# Altium PCB usb_to_rs232.PcbDoc
Units mm, origin at the board's own origin, x right, y up, seen from the top; angles counter-clockwise.
Board outline 44.32 x 31.24 mm, 2 copper layers (Top Layer, Bottom Layer); 12 components, 20 nets, 70 pads, 6 vias.
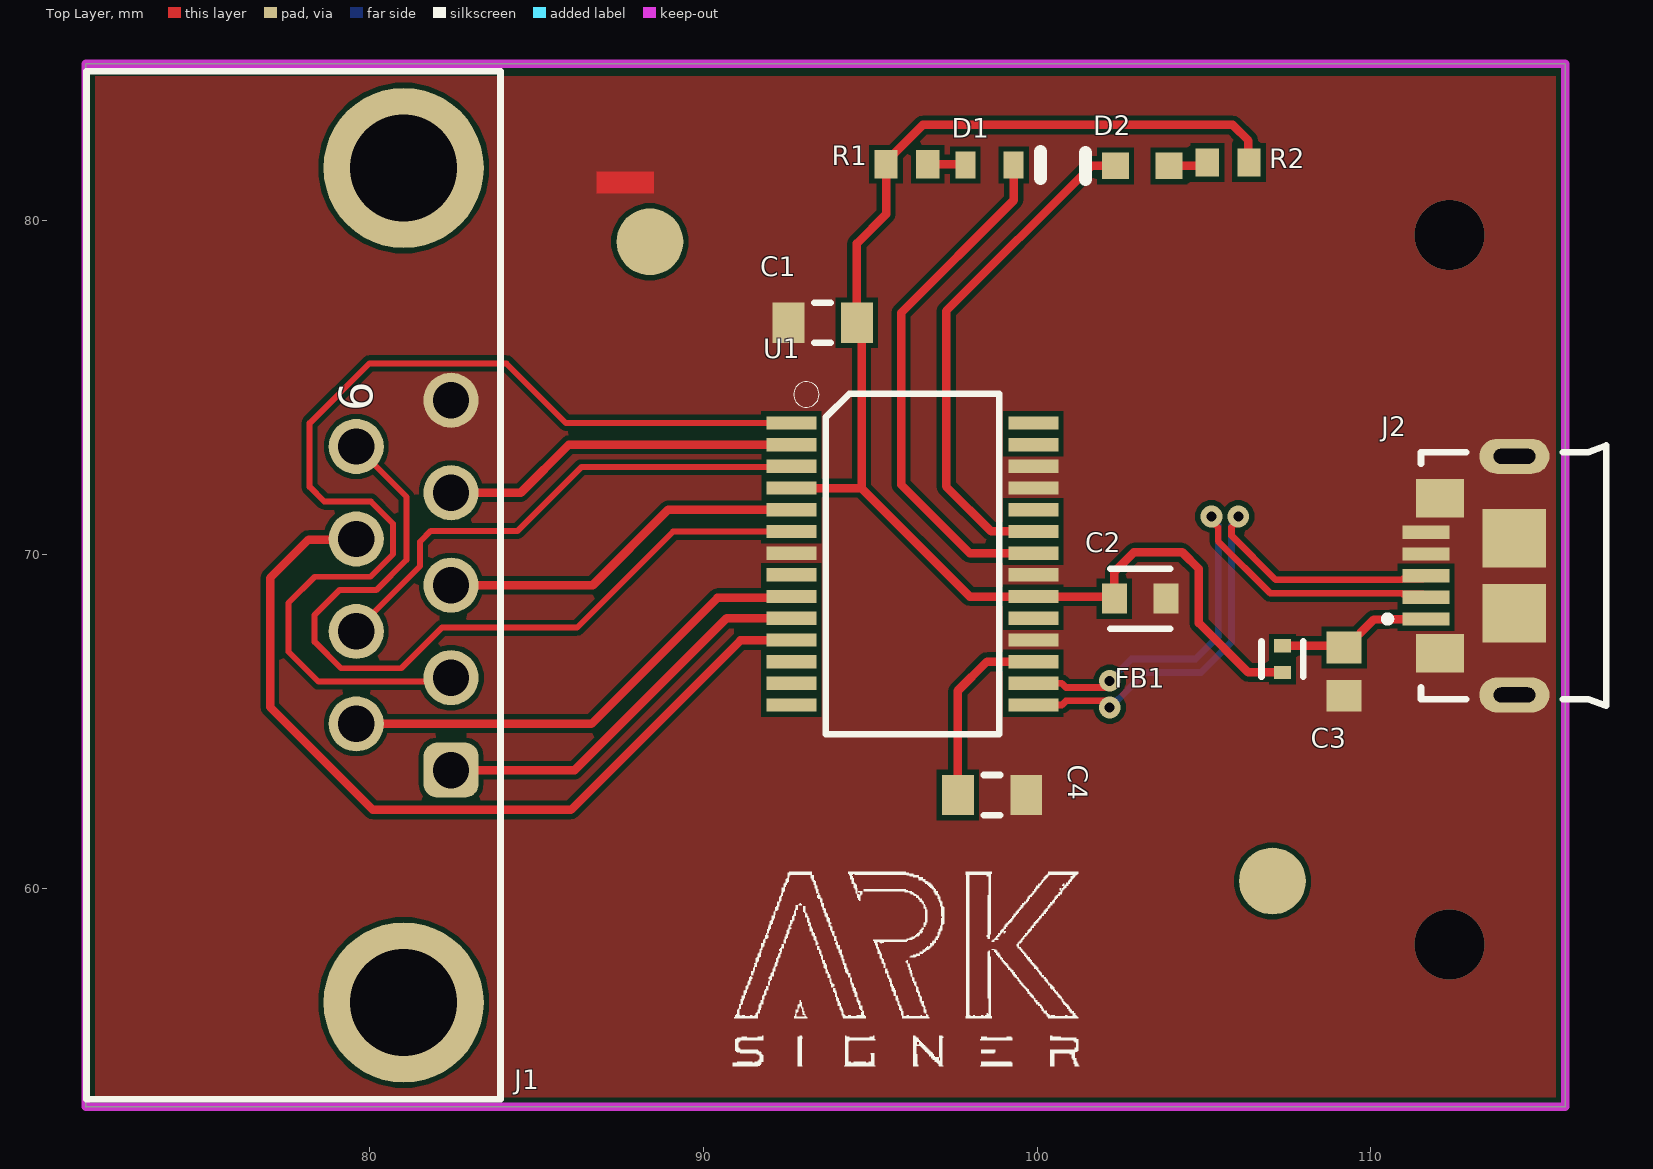
[diagram p0: Top Layer view]
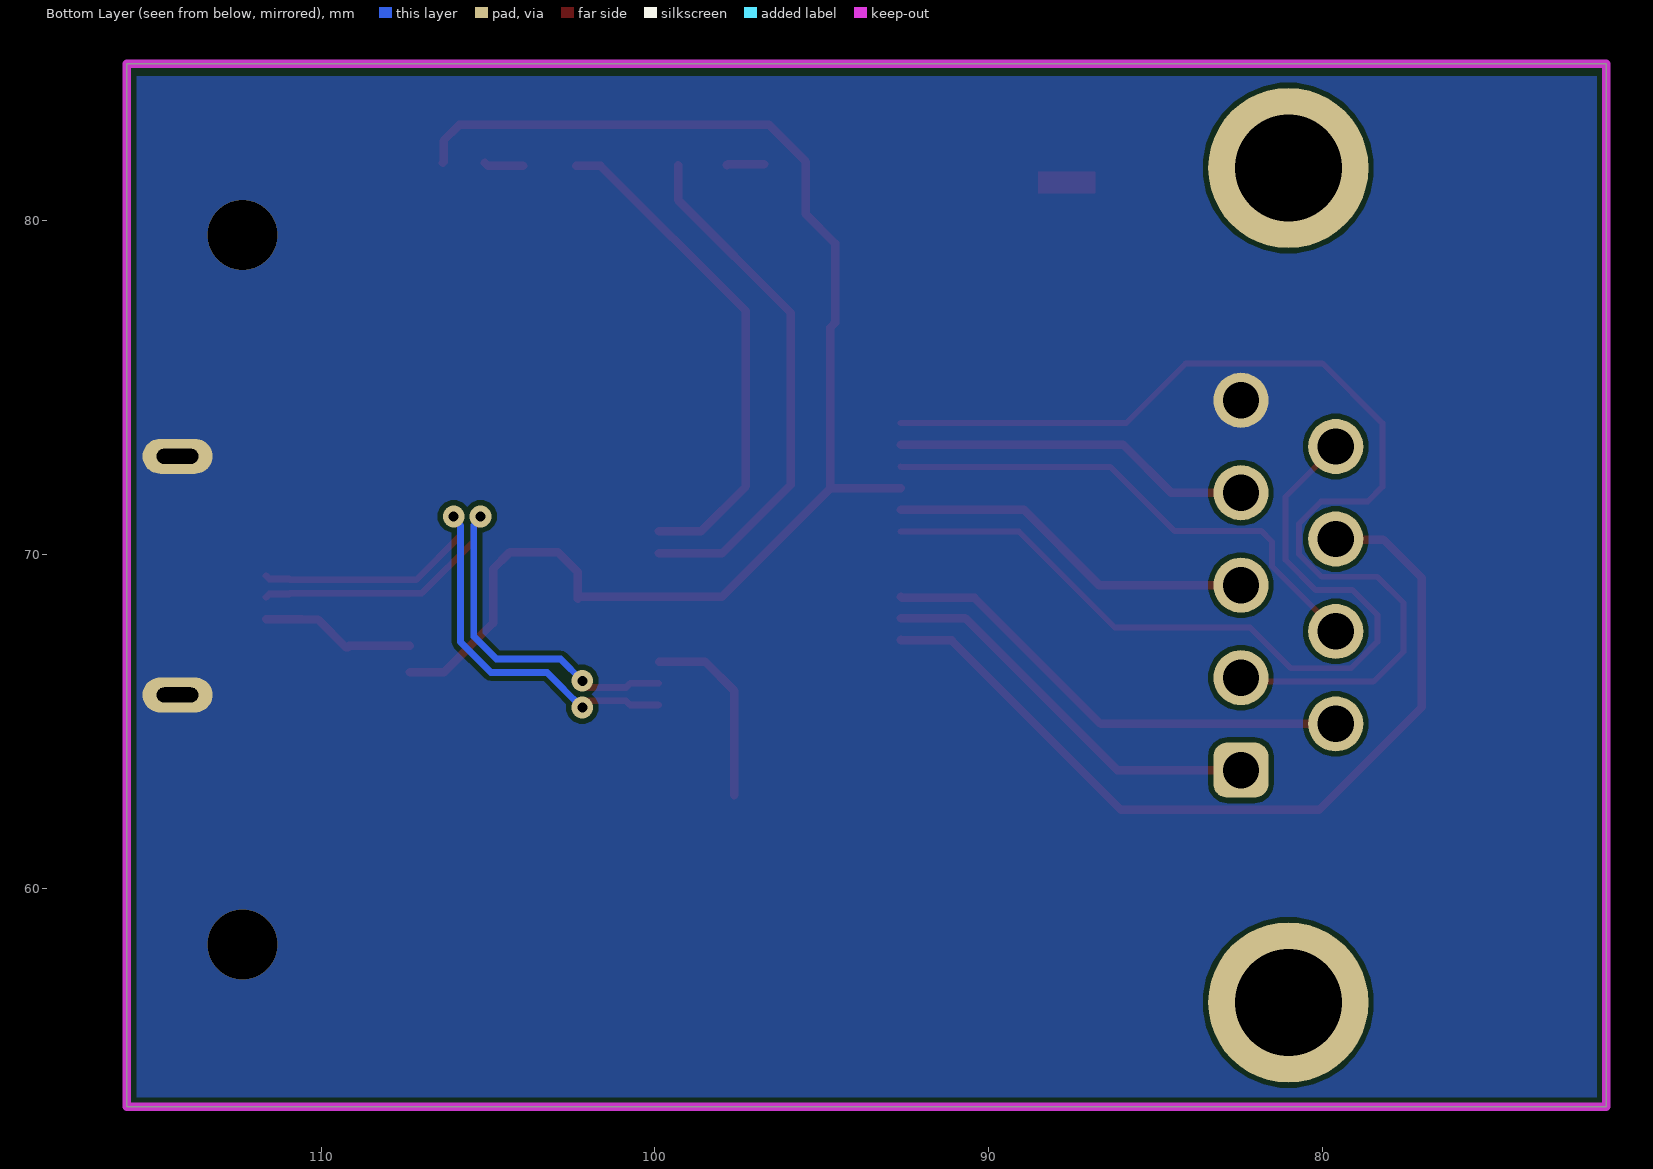
[diagram p1: Bottom Layer view, seen from below]
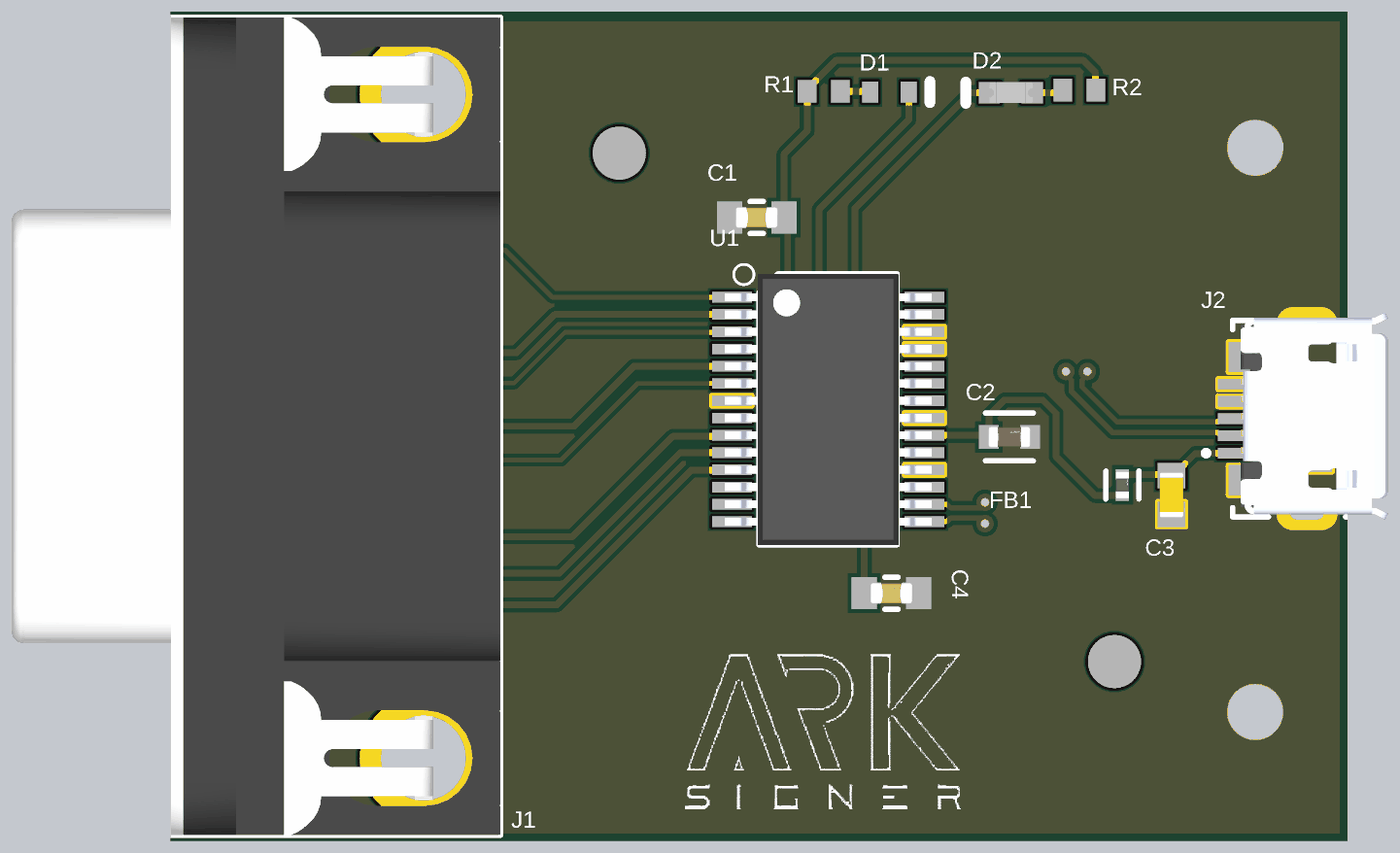
[diagram p2: 3D render of the assembled board from above, using the file's embedded part models]

## Layer stack, top to bottom
Top Solder: solder mask 0.0102, Solder Resist, Dk 3.5
Top Layer: signal copper 0.0356
Dielectric 1: dielectric 0.32, FR-4, Dk 4.8
Bottom Layer: signal copper 0.0356
Bottom Solder: solder mask 0.0102, Solder Resist, Dk 3.5

## Board outline
71.501,53.467 71.501,84.709 115.824,84.709 115.824,53.467

## Design rules (kind name [scope] priority, off if disabled: settings)
Clearance [All] p1: gap=0.15 ignorepadtopadclearanceinfootprint=FALSE
ComponentClearance [All] p1: gap=0 collisioncheckmode=3 verticalgap=0 showdistances=FALSE
DiffPairsRouting [All] p1: maxlimit=0.254 minlimit=0.2 mostfreqgap=0.2 toplayer_minwidth=0.2 toplayer_maxwidth=0.381 toplayer_prefwidth=0.2 bottomlayer_minwidth=0.2 bottomlayer_maxwidth=0.381 bottomlayer_prefwidth=0.2 maxuncoupledlength=12.7
PlaneConnect [All] p1: planeconnectstyle=Direct reliefexpansion=0.508 reliefentries=4 reliefconductorwidth=0.254 reliefairgap=0.254
PolygonConnect [All] p1: connectstyle=Direct reliefconductorwidth=0.254 reliefentries=4 polygonreliefangle="90 Angle" airgapwidth=0.254
RoutingVias [All] p1: holewidth=0.3 width=0.655 viastyle="Through Hole" minholewidth=0.3 minwidth=0.655 maxholewidth=0.711 maxwidth=1.27
SolderMaskExpansion [All] p1: expansion=0.102 istentingtop=FALSE
Width [All] p1: maxlimit=0.254 minlimit=0.15 preferedwidth=0.254 minimp=50.000000 maximp=50.000000 favimp=50.000000
27 further rules are at their usual default settings.

## Classes and differential pairs
differential pair Diff: +Diff_P -Diff_N

## Components (designator, comment, footprint, x,y, rotation, side; value= is the part's Value field where it differs from the comment)
C1 "100nF" FP-CGA3E-0_3-0_1-IPC_A 93.575,76.95 r180 top
C2 "4.7uF" FP-GRM188-0_2-MFG 103.092,68.684 r0 top
C3 "10nF" CAPC1608X90X35ML10T15 109.2,66.5 r90 top
C4 "100nF" FP-CGA3E-0_3-0_1-IPC_A 98.65,62.8 r0 top
D1 "TLMS1000-GS08" VISH-TLMS1000_V 98.575,81.675 r0 top
D2 "598-8070-107F" DIAL-0603-2_V 103.15,81.65 r0 top
FB1 "BLM15AG601SN1D" FP-BLM15-0_05-MFG 107.35,66.875 r90 top
J1 "618009211821" 618009211821 77.724,69.088 r270 top
J2 "USB3075-30-A" GCT_USB3075-30-A 111.65,68.075 r90 top
R1 "270R" RESC1608X55X30LL15T15 96.1,81.7 r180 top
R2 "270R" RESC1608X55X30LL15T15 105.725,81.75 r0 top
U1 "INTERFACE-FT232RL(SSOP28)" SSOP28-0.65-10.2X5.2MM 96.266,69.723 r270 top

## Footprints (in the part's own frame and the unit in brackets; to place one, negate y for a bottom-side part, rotate by r counter-clockwise, add the part's x,y. Pads: shape width x height; smd on the part's side, far side on the other; paste and mask are expansions set on the pad)
618009211821 [mm] "09p 8.08mm bracket, board lock & UNC4-40 Rivet without hex screw"
  rrect50% 1.65x1.65 hole 1.09: 1(5.54,4.72)
  round 1.65 hole 1.09: 2(2.77,4.72) 3(0,4.72) 4(-2.77,4.72) 5(-5.54,4.72) 6(4.155,1.88) 7(1.385,1.88) 8(-1.385,1.88) 9(-4.155,1.88)
  round 4.8 hole 3.2: M1(-12.5,3.3) M2(12.5,3.3)
  silkscreen extent -15.4,-6.2 15.4,6.2, body extent -15.4,-12.2 15.4,6.2, height 12.55
CAPC1608X90X35ML10T15 [mm] "Chip Capacitor, 2-Leads, Body 1.7x0.9mm, IPC Low Density"
  rect 0.95x1.05 smd: 1(-0.725,0) 2(0.725,0)
  body extent -0.85,-0.45 0.85,0.45, height 0.9
DIAL-0603-2_V [mm] "LED, 2-Leads, Body 1.6x0.8mm"
  rect 0.8x0.8 smd: 1(-0.8,0) 2(0.8,0)
  silkscreen extent -1.7,-0.4 -1.7,0.4, body extent -0.81,-0.39 0.81,0.39, height 0.71
FP-BLM15-0_05-MFG [mm]
  rect 0.4x0.5 smd paste+0 mask+0: 1(-0.4,0) 2(0.4,0)
  silkscreen extent -0.53,-0.63 0.52,0.63, body extent -0.7,-0.38 0.7,0.38, height 0.25
FP-CGA3E-0_3-0_1-IPC_A [mm]
  rect 0.956x1.206 smd paste+0 mask+0: 1(-1.025,0) 2(1.025,0)
  silkscreen extent -0.25,-0.6 0.25,0.6, body extent -2,-1.1 2,1.1, height 0.25
FP-GRM188-0_2-MFG [mm]
  rect 0.75x0.9 smd paste+0 mask+0: 1(-0.775,0) 2(0.775,0)
  silkscreen extent -0.9,-0.9 0.9,0.9, body extent -1.25,-0.6 1.25,0.6, height 0.25
GCT_USB3075-30-A [mm]
  rect 0.4x1.4 smd: 1(0,0) 2(0.65,0) 3(1.3,0) 4(1.95,0) 5(2.6,0)
  rect 1.15x1.45 smd: S1(-1.02,-0.42) S2(3.62,-0.42)
  rect 1.75x1.9 smd: S3(0.175,-2.65) S4(2.425,-2.65)
  oval 1.05x2.1 hole 0.45 slot 1.25 at 90 deg: S5(-2.275,-2.65) S6(4.875,-2.65)
  silkscreen extent -2.6,-5.4 5.2,1.25, body extent -2.5,-5.7 5.3,-0.15, height 2.7
RESC1608X55X30LL15T15 [mm] "Chip Resistor, 2-Leads, Body 1.60x0.80mm, IPC High Density"
  rect 0.7x0.85 smd: 1(-0.625,0) 2(0.625,0)
  body extent -0.87,-0.48 0.87,0.48, height 0.55
SSOP28-0.65-10.2X5.2MM [mm]
  rect 0.4x1.5 smd: 1(-4.225,-3.625) 2(-3.575,-3.625) 3(-2.925,-3.625) 4(-2.275,-3.625) 5(-1.625,-3.625) 6(-0.975,-3.625) 7(-0.325,-3.625) 8(0.325,-3.625) 9(0.975,-3.625) 10(1.625,-3.625) 11(2.275,-3.625) 12(2.925,-3.625) 13(3.575,-3.625) 14(4.225,-3.625) 15(4.225,3.625) 16(3.575,3.625) 17(2.925,3.625) 18(2.275,3.625) 19(1.625,3.625) 20(0.975,3.625) 21(0.325,3.625) 22(-0.325,3.625) 23(-0.975,3.625) 24(-1.625,3.625) 25(-2.275,3.625) 26(-2.925,3.625) 27(-3.575,3.625) 28(-4.225,3.625)
  silkscreen extent -5.46,-3.55 5.1,2.6, body extent -5.1,-3.9 5.1,3.9, height 2
VISH-TLMS1000_V [mm] "SMD, 2-Leads, Body 0.8x1.6mm"
  rect 0.6x0.8 smd: 1(-0.725,0) 2(0.725,0)
  silkscreen extent 1.52,-0.4 1.52,0.4, body extent -0.8,-0.4 0.8,0.4, height 0.65

## Part data
C1 C4: library part CMP-2000-04983-3, "Cap Ceramic 100nF 100V X7S 10% Pad SMD 0603 +125°C Automotive T/R", Case Code (Metric)=1608, Case Code (Imperial)=0603, Dielectric=X7S, Max Operating Temperature=125°C, Min Operating Temperature=-55°C, Package Quantity=1, Ratings=AEC-Q200, Tolerance=10%, Voltage Rating=100V, Capacitance=100nF, Case/Package=0603, Composition=Ceramic, Depth=0.8mm, Height=0.8mm, Lead Free="Lead Free", Length=1.6mm, Mount="Surface Mount", Packaging="Tape and Reel", Radiation Hardening=No, REACH SVHC="No SVHC", Termination=SMD/SMT, Thickness=0.035inch, Voltage Rating (DC)=100V, Weight=7.1E-05oz, Width=0.031inch
C2: library part CMP-2006-02545-2, "Chip Multilayer Ceramic Capacitors for General Purpose, 0603, 4.7uF, X5R, 15%, 10%, 35V", Case Code (Metric)=1608, Case Code (Imperial)=0603, Dielectric=X5R, Max Operating Temperature=85°C, Min Operating Temperature=-55°C, Package Quantity=4000, Resistor Type=Ceramic, Tolerance=10%, Voltage=35V, Capacitance=4.7uF, Case/Package=0603, Depth=0.8mm, Height=0.8mm, Lead Free="Lead Free", Length=1.6mm, Material=Ceramic, Mount="Surface Mount", Packaging="Tape and Reel", REACH SVHC="No SVHC", Termination=SMD/SMT, Thickness=0.031inch, Voltage Rating=35V, Voltage Rating (DC)=35V, Weight=0.000222oz, Width=0.8mm
C3: library part CMP-2100-03642-1, "Chip Capacitor, 10 nF, +/- 10%, 50 V, -55 to 125 degC, 0603 (1608 Metric), RoHS, Tape and Reel", Case Code (Metric)=1608, Case Code (Imperial)=0603, Dielectric=X7R, Dielectric Material=Ceramic, Manufacturer=Murata, Max Operating Temperature=125degC, Min Operating Temperature=-55degC, Package Description="2-Pin Surface Mount Device, Body 1.6 x 0.8 mm", Package Quantity=1, Tolerance=10%, Voltage=50V, Insulation Resistance=10GR, Capacitance=10nF, Case/Package=0603, Datasheet URL=http://search.murata.co.jp/Ceramy/image/img/A01X/G101/ENG/GRM188R71H103KA01-01.pdf, Datasheet Version=42401.0, Depth=0.8mm, Height=0.8mm, Lead Free=LeadFree, Length=1.6mm, Manufacturer URL=http://www.murata.com/, Material=Ceramic, Mount=SurfaceMount, Number of Pins=2, Package Reference=0603, Packaging=TapeandReel, REACH SVHC=Unknown, RoHSCompliant=True, Termination=SMD/SMT, Thickness=0.035inch, Voltage Rating=50V, Voltage Rating (DC)=50V, Width=0.031inch
D1: library part CMP-2000-07254-1, "Low Current LED, 40 mW, 1.8 V, -40 to 100 degC, 2-Pin SMD (0603), RoHS, Tape and Reel", Forward Current If=2mA, Forward Voltage=1.8V, LED Colour=Red, Manufacturer=Vishay, Package Description="2-Pin Surface Mount Device, Body 1.6 x 0.8 mm", Package Reference=TLMS1000, Automotive Qualification Standard=AEC-Q100, Bulb Size=1.6mmx0.8mm, Datasheet URL=https://datasheet.ciiva.com/5798/1698881-5798337.pdf, Datasheet Version="Rev. 1.7, 02/2011", LED Mounting=SMD, Lens Shape=Rectangular, Luminous Intensity=4mcd, Manufacturer URL=http://www.vishay.com/, Mounting Technology=SurfaceMount, MSL=MSL2-1year, Packaging=CutTape, Product Range=-, SVHC=ToBeAdvised, Viewing Angle=80°, Wavelength Typ=636nm
D2: library part CMP-2000-05654-1, "Single Color LED, 2 V, -30 to 85 degC, 2-Pin SMD (0603), RoHS, Tape and Reel", Emitting Color=YellowGreen, Forward Current=25mA, Forward Voltage=2.4V, Manufacturer=Dialight, Operating Temp Range=-40Cto100C, Operating Temperature Classification=Industrial, Package Description="2-Pin Surface Mount Device, Body 1.6 x 0.8 mm", Package Reference=0603, Package Type=SMD, Power Dissipation=60W, Reverse Voltage=5V, Test Current (It)=20mA, Chip Material=GaP, Datasheet URL=https://datasheet.ciiva.com/4688/598-selectorguide-18902-4688880.pdf, Datasheet Version="Rev. 2, 10/2008", DELETED=Compliant, Dominant Wave Length=568nm, High Brightness=No, Lens Dimensions=1.1x0.8x0.4mm, Lum Intensity=20mcd, Luminous Intensity=20mcd, Main Category=ChipLED, Manufacturer URL=http://www.dialight.com/, Mounting=SurfaceMount, Mounting Technology=SurfaceMount, Number of  Elements=1, Packaging=TapeandReel, Pin Count=2, Product Depth (mm)=0.8mm, Product Height (mm)=0.7mm, Product Length (mm)=1.6mm, Rad Hardened=No, Shape Type=Rectangular, Type=Uni-Color, Viewing Angle=140deg
FB1: library part CMP-0686-00187-4, "Chip Ferrite Bead, 0402, 600Ω @ 100MHz, 0.52Ω, 25%, 300mA", Case Code (Metric)=1005, Case Code (Imperial)=0402, Current Rating=300mA, DC Resistance (DCR)=520mR, DC Resistance-Max=600mR, Frequency=100MHz, Max Operating Temperature=125°C, Min Operating Temperature=-55°C, Package Quantity=10000, Tolerance=25%, Case/Package=0402, Core Material=Ferrite, DC Current=300mA, Depth=0.55mm, Height=0.5mm, Lead Free="Lead Free", Length=1mm, Material=Steel, Max Current Rating=300mA, Max DC Current=300mA, Military Standard=Not, Number of Circuits=1, Number of Lines=1, Number of Pins=2, Packaging="Tape and Reel", Radiation Hardening=No, REACH SVHC="No SVHC", RoHS Compliant=Yes, Series=BLM15AG_SN, Shielding=Unshielded, Termination=SMD/SMT, Test Frequency=100MHz, Width=0.5mm, Impedance=600R
J1: "WR-DSUB 8.08mm Female PCB Connector without Hex Screw, Angled, 9p", Contact Resistance=30mOhm, Manufacturer="Wurth Elektronik", Operating Temperature="-55 to +105degC", Rated Current=3A, Withstanding Voltage=1000VAC, Working Voltage=125VAC, ComponentLink1Description=Manufacturer, ComponentLink1URL=http://www.we-online.de, ComponentLink2Description=Datasheet, ComponentLink2URL=https://www.we-online.com/catalog/datasheet/618009211821.pdf, Gender=Female, Manufacturer Part Number=618009211821, Mounting Technology=THT, Packaging=Tray, Pin Number=9, Published Date="April 2021", Type=Angled
J2: "USB - micro B USB 2.0 Receptacle Connector 5 Position Surface Mount, Right Angle; Through Hole", Package=None, Digi-Key_Part_Number=2073-USB3075-30-ACT-ND, Digi-Key_Purchase_URL=https://www.digikey.com/product-detail/en/gct/USB3075-30-A/2073-USB3075-30-ACT-ND/9859705?utm_source=snapeda&utm_medium=aggregator&utm_campaign=symbol, MF="Global Connector Technology", MP=USB3075-30-A, SnapEDA_Link=https://www.snapeda.com/parts/USB3075-30-A/Global%20Connector%20Technology/view-part/229370/?ref=snap
R1 R2: library part CMP-2000-00388-1, Manufacturer=Panasonic, Part Number=ERJ3EKF2700V
U1: "USB Bridge, USB to UART USB 2.0 UART Interface 28-SSOP", Package="SSOP-28 FTDI, Future", Availability=Unavailable, MF="FTDI, Future", MP=FT232RL, Price=None, SnapEDA_Link=https://www.snapeda.com/parts/FT232RL/FTDI%2C%20Future%20Technology%20Devices%20International%20Ltd/view-part/1077088/?ref=snap

## Free pads (board coordinates)
  round 2 smd: 1(88.4,79.375) 2(107.05,60.225)

## Via types
v1: diameter 0.655, hole 0.3, Top Layer to Bottom Layer, tented both sides, 4 vias
v2: diameter 2.1, hole 2.1, Top Layer to Bottom Layer, tented both sides, 2 vias

## Nets (pads, with @x,y where several pads share a name; then routed paths per layer and width w, separated by ;. In a path a pad name is that pad's centre, name@x,y a point inside that pad or via, vN(x,y) a via of type N, cw(c..) or ccw(c..) an arc to the next point about the centre after c; other vN are vias at no path point)
CTS: J1.8 U1.11 | length 25.9
  Top Layer w0.254: J1.8@79.586,70.455 78.176,70.455 77.021,69.3 77.021,65.44 80.104,62.357 86.032,62.357 91.112,67.437 92.63,67.437 U1.11
DCD: J1.1 U1.10 | length 12.1
  Top Layer w0.254: J1.1 86.148,63.548 90.698,68.098 U1.10
Diff_N: J2.2 U1.16 | length 17.7
  Top Layer w0.2: U1.16 100.741,66.148 100.866,66.023 102.125,66.023 102.175,66.073 v1(102.175,66.225) ; v1(105.222,71.15) 105.222,71.027 105.425,70.824 105.425,70.407 106.982,68.85 110.933,68.85 110.958,68.825 111.55,68.825 J2.2
  Bottom Layer w0.2: v1(102.175,66.225) 102.825,66.875 104.75,66.875 105.425,67.55 105.425,70.875 105.222,71.078 v1(105.222,71.15)
Diff_P: J2.3 U1.15 | length 17.9
  Top Layer w0.2: U1.15 100.741,65.498 100.866,65.623 102.125,65.623 102.175,65.573 v1(102.175,65.42) ; v1(106.027,71.15) 106.027,71.027 105.825,70.824 105.825,70.573 107.147,69.25 110.933,69.25 110.958,69.275 111.55,69.275 J2.3
  Bottom Layer w0.2: v1(102.175,65.42) 102.187,65.42 102.752,65.986 102.752,65.998 103.23,66.475 104.916,66.475 105.825,67.384 105.825,70.875 106.027,71.078 v1(106.027,71.15)
DSR: J1.6 U1.9 | length 14.6
  Top Layer w0.254: J1.6 86.65,64.933 90.424,68.707 92.6,68.707 U1.9
DTR: J1.4 U1.2 | length 10.8
  Top Layer w0.254: J1.4 84.533,71.858 85.973,73.298 U1.2
GND: C1.2 C2.2 C3.1 C4.2 J1.5 J2.4 J2.5 J2.S1 J2.S2 J2.S3 J2.S4 J2.S5 J2.S6 U1.7 U1.18 U1.21 U1.25 U1.26
  other v2: 112.35,58.325 112.35,79.575
GPIO2: U1.13
GPIO3: U1.14
NetC4_1: C4.1 U1.17 | length 5.7
  Top Layer w0.254: C4.1 97.625,65.925 98.5,66.8 U1.17@99.866,66.8
NetD1_1: D1.1 R1.1 | length 1.1
  Top Layer w0.254: R1.1 97.825,81.7 D1.1
NetD2_2: D2.2 R2.1 | length 1.2
  Top Layer w0.254: D2.2 105,81.65 R2.1
RI: J1.9 U1.6 | length 24.6
  Top Layer w0.178: J1.9 81.11,71.737 81.11,69.849 80.199,68.938 79.098,68.938 78.359,68.199 78.359,67.39 79.148,66.601 80.952,66.601 82.167,67.816 86.216,67.816 89.098,70.698 U1.6
RTS: J1.7 U1.3 | length 15.5
  Top Layer w0.178: J1.7 79.603,67.748 81.513,69.658 81.513,70.39 81.838,70.715 84.44,70.715 86.349,72.624 92.617,72.624 U1.3
RXDATA: J1.3 U1.5 | length 11.1
  Top Layer w0.254: J1.3 86.688,69.088 88.948,71.348 U1.5
RXLED: D1.2 U1.22 | length 15.8
  Top Layer w0.254: D1.2 99.3,80.622 95.925,77.247 95.925,72.1 97.977,70.048 U1.22
TXDATA: J1.2 U1.1 | length 32.2
  Top Layer w0.178: J1.2 82.323,66.197 78.472,66.197 77.575,67.094 77.575,68.558 78.359,69.342 80.031,69.342 80.706,70.017 80.706,70.929 80.039,71.596 78.645,71.596 78.208,72.033 78.208,73.942 79.997,75.73 84.102,75.73 85.884,73.948 U1.1
TXLED: D2.1 U1.23 | length 15.3
  Top Layer w0.254: U1.23 98.627,70.698 97.275,72.05 97.275,77.297 101.628,81.65 D2.1
VBUS: C3.2 FB1.2 J2.1 | length 4.7
  Top Layer w0.254: FB1.2 109.15,67.275 C3.2 109.25,67.225 110.086,68.061 110.555,68.061 110.569,68.075 J2.1
VCC: C1.1 C2.1 FB1.1 R1.2 R2.2 U1.4 U1.20 | length 41.9
  Top Layer w0.254: U1.4 94.731,71.998 ; R2.2 106.329,81.771 106.329,82.407 105.861,82.875 96.575,82.875 95.475,81.775 R1.2 95.475,80.2 94.6,79.325 C1.1 94.742,76.808 94.742,72.009 94.731,71.998 ; FB1.1 106.326,66.475 104.85,67.951 104.85,69.575 104.35,70.075 102.9,70.075 102.317,69.492 C2.1 102.253,68.748 U1.20 97.981,68.748 94.731,71.998
pads on no net: J1.M1 J1.M2 U1.8 U1.12 U1.19 U1.24 U1.27 U1.28

## Polygon pours and split planes (outlines as drawn)
GND on Bottom Layer "GND_L02_P001" (solid, pour order 1): 71.755,84.328 115.525,84.328 115.525,53.721 71.755,53.721
GND on Top Layer "GND_L01_P000" (solid, pour order 0): 71.628,84.328 115.824,84.328 115.824,53.721 71.628,53.721

## Keep-outs
Keep-Out Layer:
  the board outline again, w0.254

## Other copper
Top Layer:
  rectangle net GND: 86.8,80.825 88.525,81.475

## Silkscreen, mask and mechanical layers (free items; w line width, h text height)
Top Overlay:
  drawing of 33 lines, arcs and shapes, not listed

## Text inside footprints (layer, text, board x,y; h text height)
J1: Top Overlay "9" at 79.074,75.188 h1.02 r270; Top 3D Body "PCB Edge" at 69.674,68.388 h1.02 r270
J2: Mechanical 13 "PCB EDGE" at 115.705,73.791 h0.41 r90